# Altium PCB iRat_2.0.PcbDoc
Units mm, origin at the board's own origin, x right, y up, seen from the top; angles counter-clockwise.
Board outline 64 x 62.56 mm, 2 copper layers (Top Layer, Bottom Layer); 82 components, 77 nets, 330 pads, 87 vias.
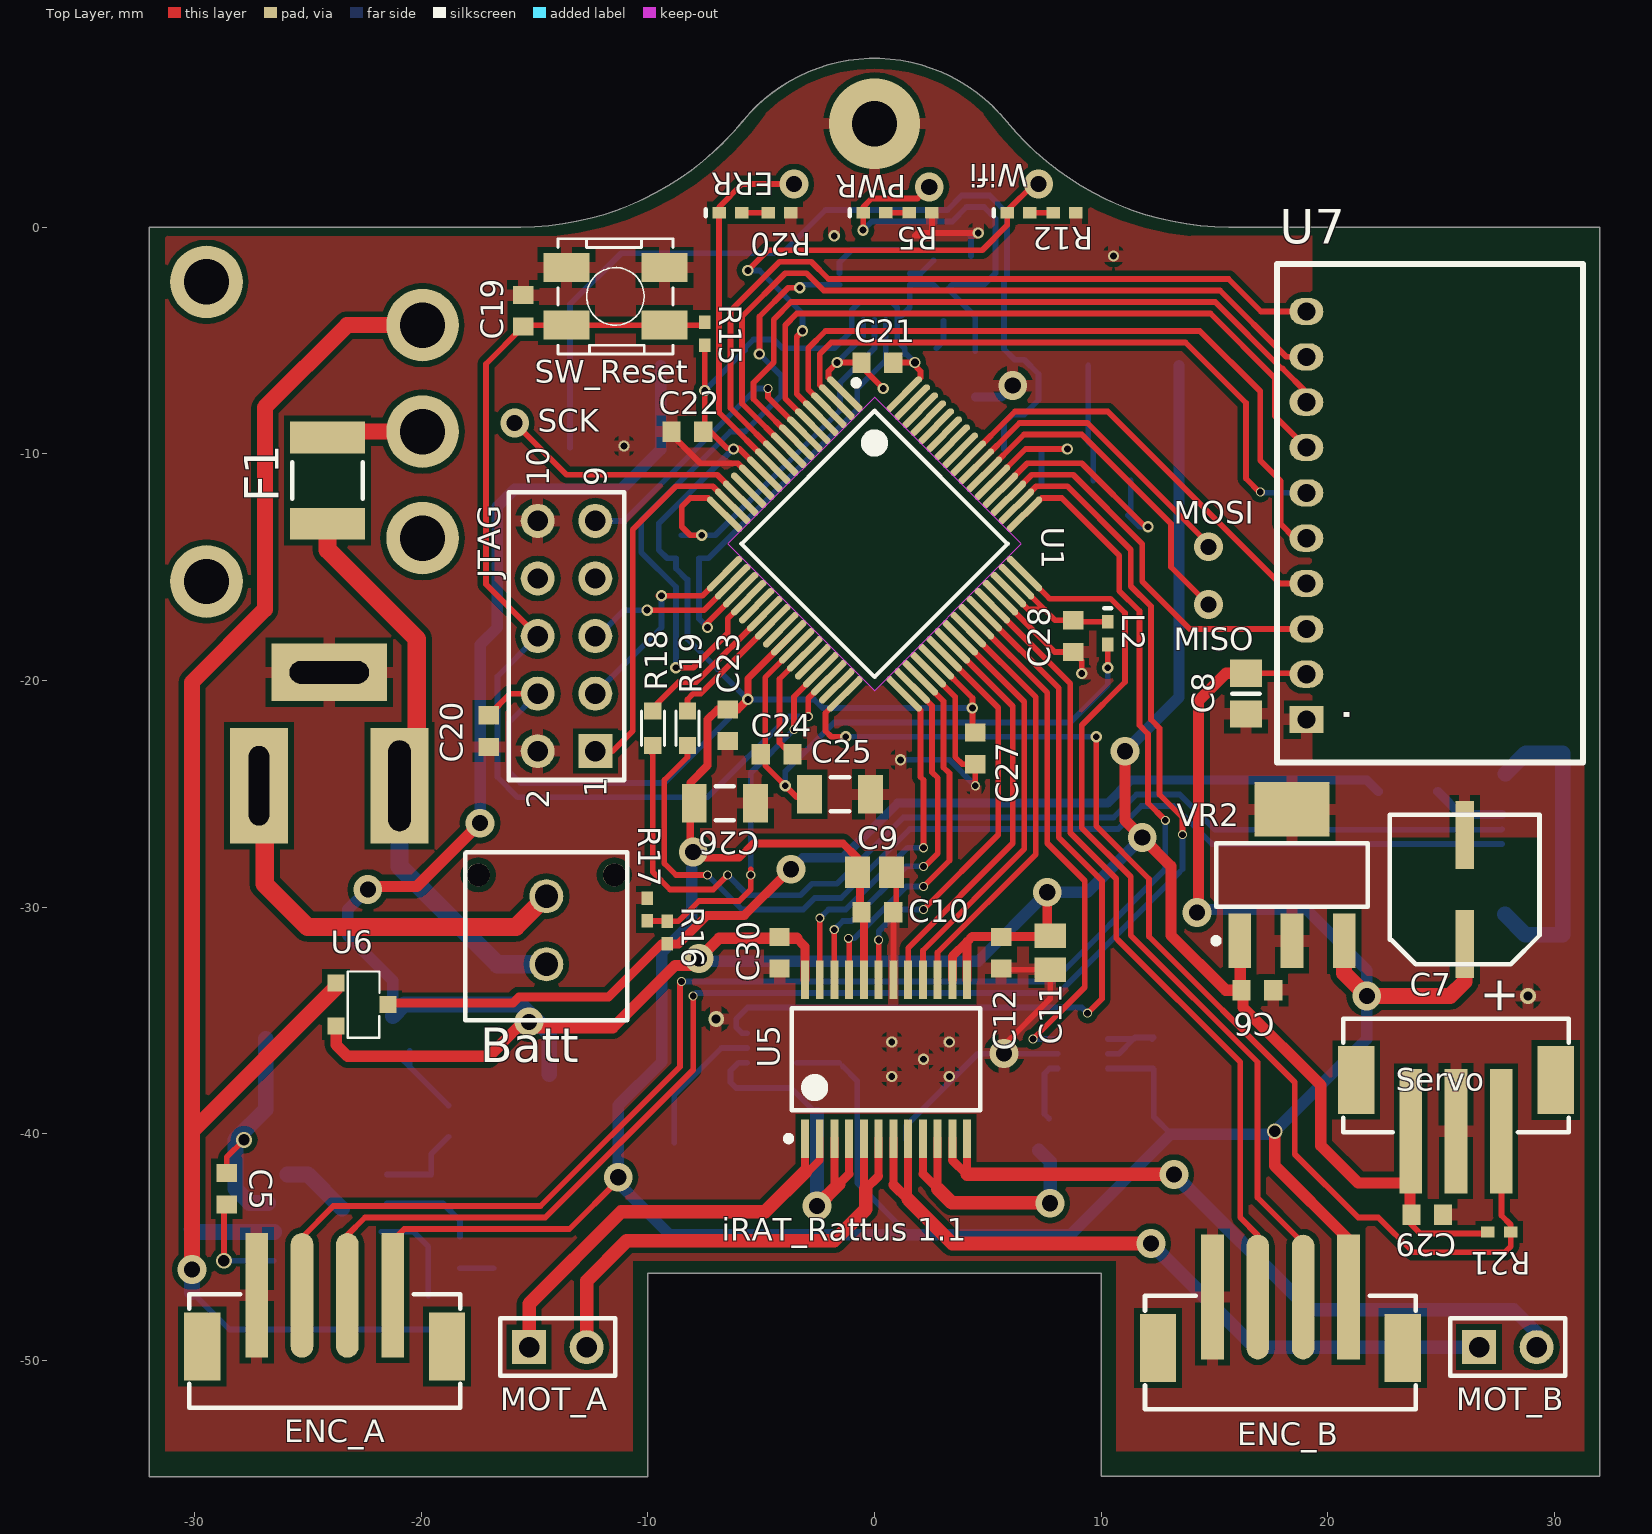
[diagram p0: Top Layer view]
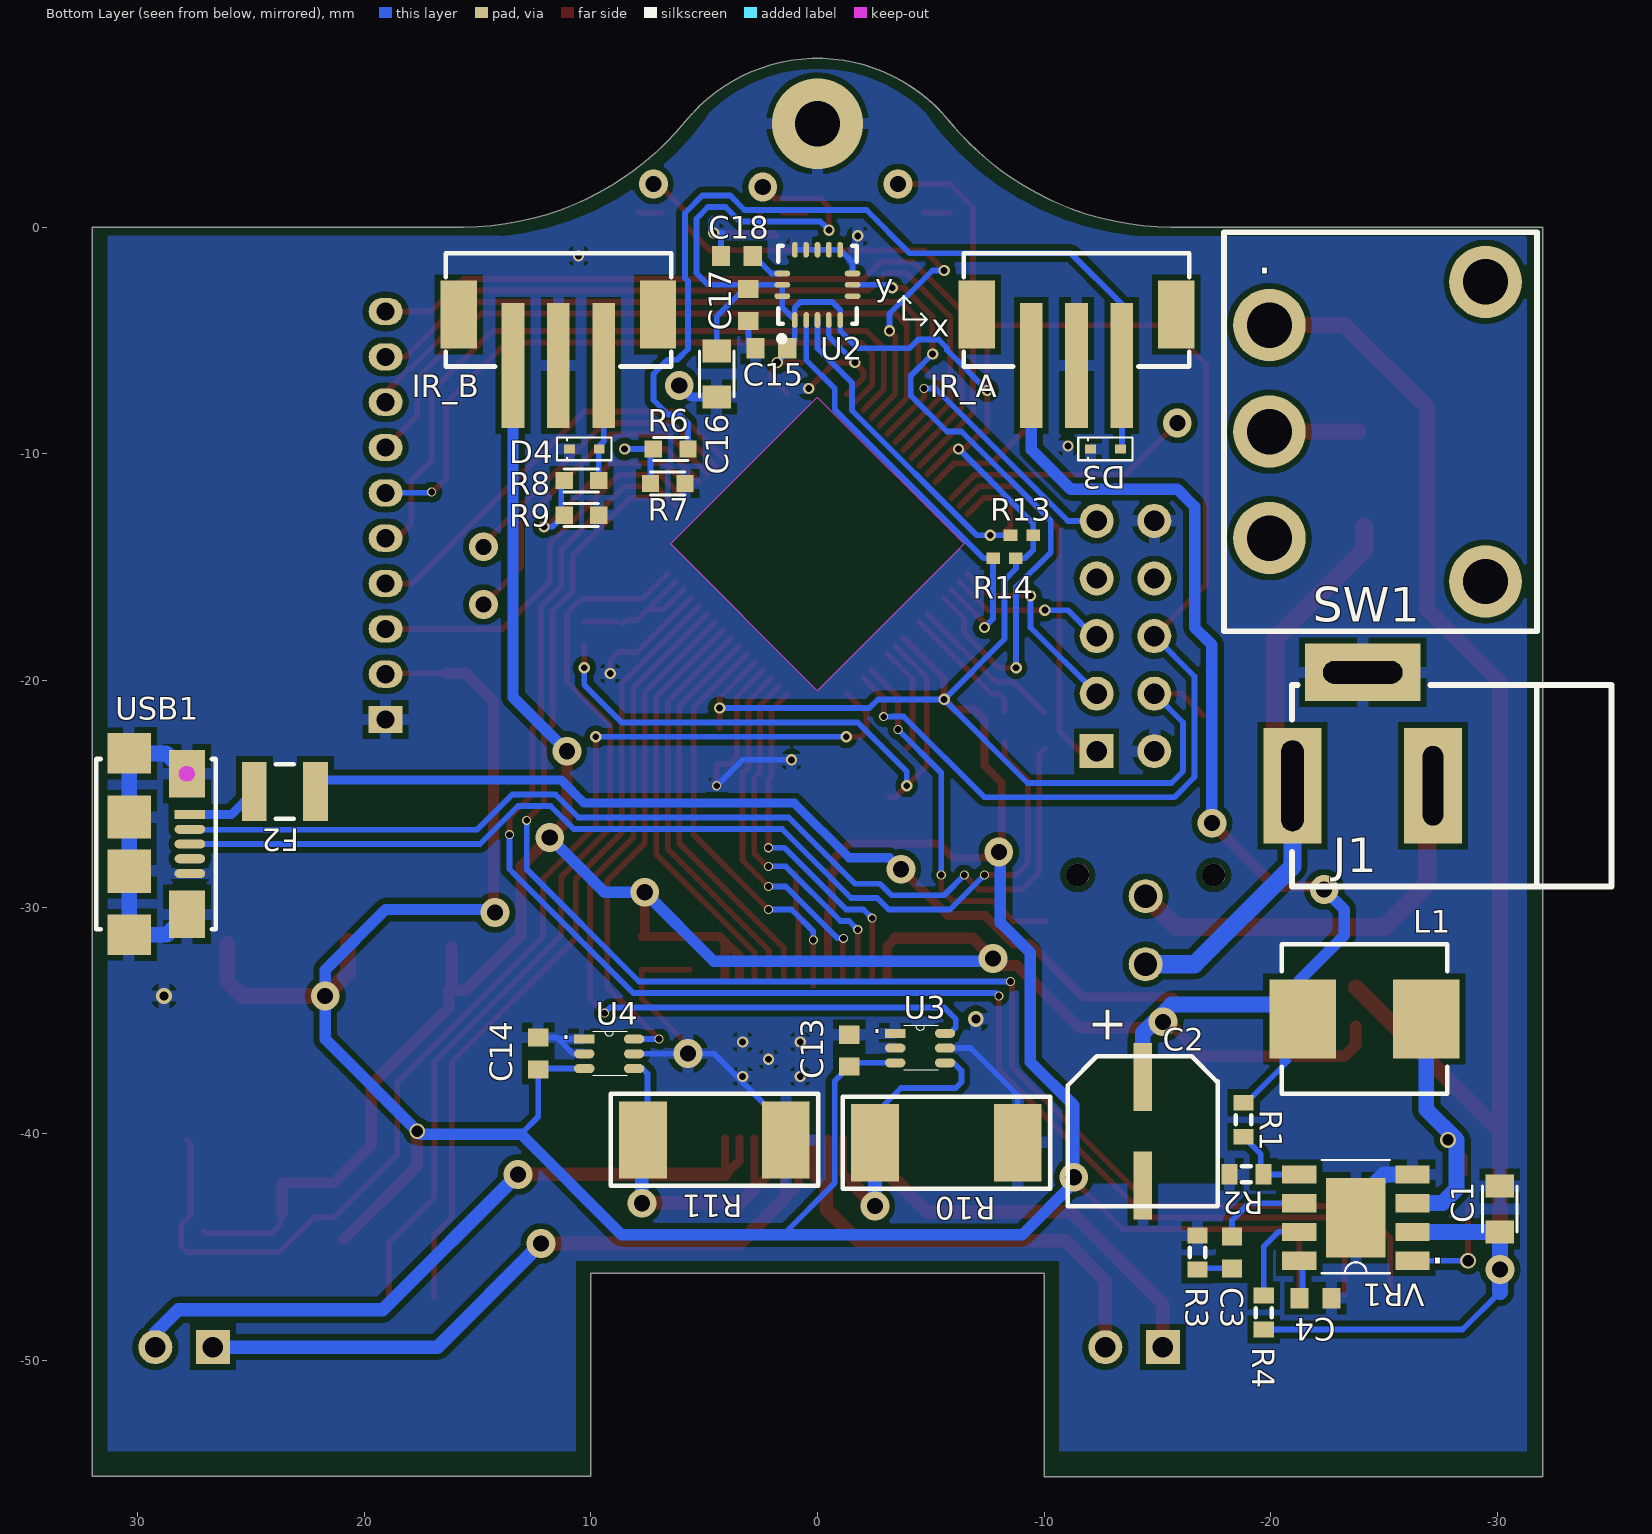
[diagram p1: Bottom Layer view, seen from below]

## Layer stack, top to bottom
Top Solder: solder mask 0.0102, Solder Resist, Dk 3.5
Top Layer: signal copper 0.0356
Dielectric 1: dielectric 0.32, FR-4, Dk 4.8
Bottom Layer: signal copper 0.0356
Bottom Solder: solder mask 0.0102, Solder Resist, Dk 3.5

## Board outline
-32,-55.118 -32,0 -15.616,0 ccw(c-15.684,12.749) -5.836,4.653 cw(c0.002,-0.044) 5.841,4.652 ccw(c15.689,12.749) 15.621,0 32,0 32,-55.108 10,-55.108 10,-46.146 -10,-46.146 -10,-55.118

## Design rules (kind name [scope] priority, off if disabled: settings)
Clearance [All] p1: gap=0.254
HoleSize [All] p1: absolutevalues=TRUE maxlimit=4.064 minlimit=0.762 maxpercent=80.000 minpercent=20.000
HoleToHoleClearance [All] p1: gap=0.152 allowstackedmicrovias=TRUE
MinimumSolderMaskSliver [All] p1: minsoldermaskwidth=0.01
PolygonConnect [All] p1: connectstyle=Relief reliefconductorwidth=0.508 reliefentries=4 polygonreliefangle="90 Angle" airgapwidth=0.254
RoutingVias [All] p1: holewidth=0.762 width=1.27 viastyle="Through Hole" minholewidth=0.762 minwidth=1.27 maxholewidth=1.524 maxwidth=3.048
SilkToSilkClearance [All] p1: silktosilkclearance=0.01
SilkToSolderMaskClearance [IsPad] p1: minsilkscreentomaskgap=0.01 clearancetoexposedcopper=TRUE
SolderMaskExpansion [All] p1: expansion=0.102
Width [All] p1: maxlimit=2.032 minlimit=0.254 preferedwidth=0.508
24 further rules are at their usual default settings.

## Components (designator, comment, footprint, x,y, rotation, side; value= is the part's Value field where it differs from the comment)
Batt "Batt" "Molex 43045-0202" -14.478,-32.512 r0 top
C1 "Cap Semi" 0805E -30.099,-42.291 r270 bottom
C2 "Cap Pol2" Capacitor_SizeD8 -14.351,-39.878 r90 bottom
C3 "Cap Semi" 1608[0603] -18.288,-45.226 r90 bottom
C4 "Cap Semi" 1608[0603] -21.971,-47.244 r0 bottom
C5 "Cap Semi" 1608[0603] -28.575,-42.418 r270 top
C6 "Cap Semi" 1608[0603] 16.891,-33.655 r180 top
C7 "Cap Pol2" Capacitor_SizeD8 26.035,-29.21 r270 top
C8 "Cap Semi" 6-0805_N 16.383,-20.574 r270 top
C9 "Cap Pol3" C0805 0,-28.448 r0 top (schematic designator C10)
C10 "Cap Semi" 1608[0603] 0.127,-30.226 r0 top
C11 "Cap Pol3" C0805 7.747,-32.004 r270 top
C12 "Cap Semi" 1608[0603] 5.588,-32.004 r270 top
C13 "Cap Semi" 1608[0603] -1.397,-36.322 r270 bottom
C14 "Cap Semi" 1608[0603] 12.319,-36.449 r270 bottom
C15 "Cap Semi" 1608[0603] 2.032,-5.334 r180 bottom
C16 "Cap Semi" 0805E 4.445,-7.493 r90 bottom
C17 "Cap Semi" 1608[0603] 3.048,-3.429 r90 bottom
C18 "Req 10nF 10%, 16V Ceramic" 1608[0603] 3.556,-1.27 r180 bottom
C19 "Cap Semi" 1608[0603] -15.494,-3.683 r270 top
C20 "Cap Semi" 1608[0603] -17.018,-22.225 r270 top
C21 "Cap Semi" 1608[0603] 0.127,-5.969 r0 top
C22 "Cap Semi" 1608[0603] -8.255,-9.017 r0 top
C23 "Cap Semi" 1608[0603] -6.477,-21.971 r90 top
C24 "Cap Semi" 1608[0603] -4.318,-23.241 r180 top
C25 "Cap Semi" C1206 -1.524,-25.019 r180 top
C26 "" C1206 -6.604,-25.4 r180 top
C27 "Cap Semi" 1608[0603] 4.445,-22.987 r90 top
C28 "Cap Semi" 1608[0603] 8.763,-18.034 r90 top
C29 "Cap Semi" 1608[0603] 24.384,-43.561 r180 top
C30 "Cap Semi" 1608[0603] -4.191,-32.004 r270 top
D3 "3.3V Zener" MM5Z3V3T1G -12.7,-9.779 r180 bottom
D4 "3.3V Zener" MM5Z3V3T1G 10.287,-9.779 r180 bottom
ENC_A "Header 4" "JST PH 4-Way" -24.257,-47.117 r0 top
ENC_B "Header 4" "JST PH 4-Way" 17.907,-47.193 r0 top
ERR "LNJ347W83RA" 0402-A -6.35,0.635 r0 top
F1 "3A" 1812 -24.13,-11.176 r90 top
F2 "1210L050YR 0.5A" 14-1210 23.495,-24.892 r180 bottom
IR_A "Header 3" "JST PH 3-Way" -11.43,-6.096 r0 bottom
IR_B "Header 3" "JST PH 3-Way" 11.43,-6.096 r0 bottom
J1 "PWR2.1" DCP21 -20.955,-24.638 r270 bottom
JTAG "Header" HDR2X5 -12.319,-23.114 r90 top
L1 "Inductor" SRP7028A-100M -24.13,-34.925 r0 bottom
L2 "Ferrite Bead" 0402-A 10.287,-17.907 r270 top
MOT_A "Header 2" HDR1X2 -15.24,-49.403 r0 top
MOT_B "Header 2" HDR1X2 26.67,-49.403 r0 top
PWR "LNJ347W83RA" 0402-A 0,0.635 r0 top
R1 "Res Semi" J1-0603 -18.796,-39.37 r90 bottom
R2 "Res Semi" J1-0603 -18.923,-41.783 r180 bottom
R3 "Res Semi" J1-0603 -16.764,-45.226 r270 bottom
R4 "Res Semi" J1-0603 -19.685,-47.879 r270 bottom
R5 "Res1" 0402 2.032,0.635 r180 top
R6 "Res1" 0603E 7.239,-9.779 r180 bottom (schematic designator R10)
R7 "Res1" 0603E 5.842,-11.303 r0 bottom (schematic designator R11)
R8 "Res1" 0603E 11.176,-11.176 r180 bottom
R9 "Res1" 0603E 9.652,-12.7 r0 bottom
R10 "Shunt Resistor" ERJM1WS -2.54,-40.386 r180 bottom
R11 "Shunt Resistor" ERJM1WS 1.397,-40.259 r0 bottom
R12 "Res3" 0402 8.382,0.635 r180 top
R13 "Res Semi" 0402 -9.017,-13.589 r180 bottom
R14 "Res Semi" 0402 -8.255,-14.605 r180 bottom
R15 "" 0402 -7.493,-4.699 r90 top
R16 "Res Semi" 0402 -9.144,-31.115 r270 top
R17 "Res Semi" 0402 -10.033,-30.099 r270 top
R18 "Res1" 0603E -9.779,-21.336 r270 top
R19 "Res1" 0603E -8.255,-21.336 r270 top
R20 "Res3" 0402 -4.191,0.635 r180 top
R21 "Res Semi" 0402 27.559,-44.323 r180 top
Servo "Servo1" "JST PH 3-Way" 25.654,-39.878 r180 top
SW1 "SW-SPDT" Slide_Switch -19.939,-9.017 r0 bottom
SW_Reset "RESET" SW16 -9.271,-4.318 r90 top
U1 "ATUC256L3U-AUT" TQFP64_M 0,-13.97 r315 top
U2 "LSM6DS0" LGA16-3X3X1_N 0,-2.54 r90 bottom
U3 "SC70-6" SC70#1 -3.429,-35.56 r180 bottom
U4 "SC70-6" SC70#2 10.287,-35.814 r180 bottom
U5 "TB6612FNG" TSOP65P760X160-24N 0.508,-36.703 r90 top
U6 "FDN306P" FDN306P -21.463,-34.29 r270 top
U7 "USR-WIFI232-T" USR-WIFI232-T 19.05,-21.717 r90 top
USB1 "ZX62-B-5PA(11)" ZX62-B-5PA(11) 27.686,-25.908 r270 bottom
VR1 "AP6503SP-13" SO-8EP -23.749,-43.688 r0 bottom
VR2 "LM3940" SOT223_N 18.415,-28.575 r90 top
Wifi "LNJ347W83RA" 0402-A 6.35,0.635 r0 top

## Footprints (in the part's own frame and the unit in brackets; to place one, negate y for a bottom-side part, rotate by r counter-clockwise, add the part's x,y. Pads: shape width x height; smd on the part's side, far side on the other; paste and mask are expansions set on the pad)
6-0805_N [mm] "Chip Resistor, Body 2.0x1.2mm, IPC Medium Density"
  rect 1.2x1.4 smd: 1(-0.9,0) 2(0.9,0)
  silkscreen extent 0,-0.6 0,0.6, body extent -1.07,-0.7 1.07,0.7, height 0.7
14-1210 [mm] "Chip Resistor, Body 3.2x2.5mm, IPC High Density"
  rect 1.1x2.6 smd: 1(-1.35,0) 2(1.35,0)
  silkscreen extent -0.4,-1.2 0.4,1.2, body extent -1.68,-1.32 1.68,1.32, height 0.9
0402 [mm] "Chip Capacitor, Body 1.0x0.5mm, IPC High Density"
  rect 0.6x0.5 smd: 1(-0.5,0) 2(0.5,0)
  body extent -0.55,-0.3 0.55,0.3, height 1.3
0402-A [mm] "Chip Inductor, Body 1.0x0.5mm, IPC High Density"
  rect 0.6x0.5 smd: 1(-0.5,0) 2(0.5,0)
  silkscreen extent -1.1,-0.15 -1.1,0.15, body extent -0.55,-0.3 0.55,0.3, height 0.55
0603E [mil]
  rect 30x30 smd: 1(0,0) 2(60,0)
  silkscreen extent 0,-20 60,20
0805E [mil]
  rect 40x50 smd: 1(0,0) 2(80,0)
  silkscreen extent 0,-30 80,30
1608[0603] [mm] "Chip Capacitor, Body 1.6x0.8mm, IPC High Density"
  rect 0.8x0.9 smd: 1(-0.7,0) 2(0.7,0)
  body extent -0.87,-0.48 0.87,0.48, height 1.3
1812 [mm] "Chip Capacitor, Body 4.5x3.2mm, IPC High Density"
  rect 1.4x3.3 smd: 1(-1.9,0) 2(1.9,0)
  silkscreen extent -0.8,-1.55 0.8,1.55, body extent -2.4,-1.7 2.4,1.7, height 1.4
C0805 [mm] "Chip Capacitor, Body 2.0x1.3mm, IPC High Density"
  rect 1.1x1.4 smd: 1(-0.75,0) 2(0.75,0)
  body extent -1.1,-0.72 1.1,0.72, height 1.4
C1206 [mm] "Chip Capacitor, Body 3.2x1.6mm, IPC High Density"
  rect 1.1x1.7 smd: 1(-1.35,0) 2(1.35,0)
  silkscreen extent -0.4,-0.75 0.4,0.75, body extent -1.7,-0.9 1.7,0.9, height 1.3
Capacitor_SizeD8 [mm] "100uF EEEFKE101XAP"
  rect 3x0.8 smd: 1(2.4,0) 2(-2.4,0)
  Top Layer pour cut-out: -2.286,-3.3 2.215,-3.3 2.215,-3.246 3.3,-2.161 3.3,2.034 2.034,3.3 -2.286,3.3
  silkscreen extent -3.3,-3.3 3.3,3.3
DCP21 [mm]
  rect 5.08x2.54 hole 1 slot 4 at 0 deg: 1(0,0)
  rect 5.08x2.54 hole 0.9 slot 3.5 at 0 deg: 2(0,6.2)
  rect 2.54x5.08 hole 1 slot 3.5 at 90 deg: 3(-5,3.1)
  silkscreen extent -4.44,-0.02 4.45,14.07
ERJM1WS [mm] "6mOhm Shunt Resistor"
  rect 2.1x3.4 smd: 1(0,0) 2(6.3,0)
  Top Layer pour cut-out: 1.143,2.032 1.143,-2.032 5.207,-2.032 5.207,2.032
  silkscreen extent -1.42,-2.03 7.72,2.03
FDN306P [mm]
  rect 0.76x0.76 smd: D(0,0) G(-0.95,-2.29) S(0.95,-2.29)
  Top Layer pour cut-out: -1.46,-0.378 -1.457,-0.381 1.46,-0.381 1.46,-1.781 1.457,-1.778 -1.46,-1.778
  silkscreen extent -1.46,-1.78 1.46,-0.38
HDR1X2 [mm] "Connector; Header; 2 Position"
  rect 1.5x1.5 hole 0.9: 1(0,0)
  round 1.5 hole 0.9: 2(2.54,0)
  silkscreen extent -1.27,-1.27 3.81,1.27
HDR2X5 [mm] "Connector; Header; 5x2 Position"
  rect 1.5x1.5 hole 0.9: 1(0,0)
  round 1.5 hole 0.9: 2(0,2.54) 3(2.54,0) 4(2.54,2.54) 5(5.08,0) 6(5.08,2.54) 7(7.62,0) 8(7.62,2.54) 9(10.16,0) 10(10.16,2.54)
  silkscreen extent -1.27,-1.27 11.43,3.81
J1-0603 [mm] "Chip Resistor, Body 1.6x0.8mm, IPC High Density"
  rect 0.7x0.9 smd: 1(-0.75,0) 2(0.75,0)
  silkscreen extent -0.2,-0.35 0.2,0.35, body extent -0.85,-0.48 0.85,0.48, height 0.9
"JST PH 3-Way" [mm] "SMT Vertical"
  rect 1x5.5 smd: 1(-2,0) 2(0,0) 3(2,0)
  rect 1.6x3 smd: ""(-4.4,-2.25) ""(4.4,-2.25)
  silkscreen extent -4.97,-4.95 4.97,0.05
"JST PH 4-Way" [mm] "SMT Vertical"
  rect 1x5.5 smd: 1(-3,0) 4(3,0)
  oval 1x5.5 smd: 2(-1,0) 3(1,0)
  rect 1.6x3 smd: ""(-5.4,-2.25) ""(5.4,-2.25)
  silkscreen extent -5.97,-4.95 5.97,0.05
LGA16-3X3X1_N [mm] "PQFN, 16-Leads, Body 3x3mm, Pitch 0.5mm, IPC Medium Density"
  oval 0.7x0.25 smd: 1(-1.55,1) 2(-1.55,0.5) 3(-1.55,0) 4(-1.55,-0.5) 5(-1.55,-1) 9(1.55,-1) 10(1.55,-0.5) 11(1.55,0) 12(1.55,0.5) 13(1.55,1)
  oval 0.25x0.7 smd: 6(-0.5,-1.55) 7(0,-1.55) 8(0.5,-1.55) 14(0.5,1.55) 15(0,1.55) 16(-0.5,1.55)
  silkscreen extent -2.5,-1.73 1.73,1.73, body extent -1.58,-1.58 1.58,1.58, height 1
MM5Z3V3T1G [mm]
  rect 0.48x0.4 smd: 1(-0.66,0) 2(0.66,0)
  silkscreen extent -1.2,-0.5 1.2,0.5
"Molex 43045-0202" [mm] "Battery Connector"
  round 1.5 hole 1.02: 1(0,0) 2(0,3)
  round 1.02 hole 1.02 unplated: ""(-3,3.94) ""(3,3.94)
  silkscreen extent -3.57,-2.47 3.57,4.93
SC70#1 [mm] "Current Sense Comparator"
  rect 0.9x0.4 smd: 1(0,0)
  oval 0.9x0.4 smd: 2(0,-0.65) 3(0,-1.3) 4(2.2,-1.3) 5(2.2,-0.65) 6(2.2,0)
  Top Layer pour cut-out: 0.381,0.325 0.381,-1.625 1.905,-1.625 1.905,0.325
  silkscreen extent 0.38,-1.63 1.91,0.33
SC70#2 [mm]
  rect 0.9x0.4 smd: 1(0,0)
  oval 0.9x0.4 smd: 2(0,-0.65) 3(0,-1.3) 4(2.2,-1.3) 5(2.2,-0.65) 6(2.2,0)
  silkscreen extent 0.38,-1.63 1.91,0.33
Slide_Switch [mm]
  round 3.2 hole 2: 1(0,-4.7) 2(0,0) 3(0,4.7) 4(-9.53,-6.61) 4(-9.53,6.61)
  silkscreen extent -11.8,-8.8 2,8.8
SO-8EP [mm]
  rect 1.505x0.802 smd: 1(-2.497,1.905) 2(-2.497,0.635) 3(-2.497,-0.635) 4(-2.497,-1.905) 5(2.498,-1.905) 6(2.498,-0.635) 7(2.498,0.635) 8(2.498,1.905)
  rect 2.613x3.502 smd: ""(0,0)
  silkscreen extent -1.5,-2.54 1.5,2.45
SOT223_N [mm] "SOT223, 4-Leads, Body 6.5x3.5mm, Pitch 2.3mm, Lead Span 7mm, IPC Medium Density"
  rect 2.4x1 smd: 1(-2.9,2.3) 2(-2.9,0) 3(-2.9,-2.3)
  rect 2.4x3.3 smd: 4(2.9,0)
  silkscreen extent -3.02,-3.35 1.4,3.47, body extent -1.85,-3.35 1.85,3.35, height 1.7
SRP7028A-100M [mm] "10uH Inductor"
  rect 2.95x3.5 smd: 1(-2.725,0) 2(2.725,0)
  Top Layer pour cut-out: -3.65,3.3 3.65,3.3 3.65,-3.3 -3.65,-3.3
  silkscreen extent -3.65,-3.3 3.65,3.3
SW16 [mil]
  rect 50x80 smd: 1(0,170) 1(0,0) 2(100,170) 2(100,0)
  silkscreen extent -50,-15 150,185
TQFP64_M [mm] "Thin QFP, 64-Leads, Body 10x10mm, Pitch 0.5mm, IPC Low Density"
  oval 2.1x0.3 smd: 1(-5.6,3.75) 2(-5.6,3.25) 3(-5.6,2.75) 4(-5.6,2.25) 5(-5.6,1.75) 6(-5.6,1.25) 7(-5.6,0.75) 8(-5.6,0.25) 9(-5.6,-0.25) 10(-5.6,-0.75) 11(-5.6,-1.25) 12(-5.6,-1.75) 13(-5.6,-2.25) 14(-5.6,-2.75) 15(-5.6,-3.25) 16(-5.6,-3.75) 33(5.6,-3.75) 34(5.6,-3.25) 35(5.6,-2.75) 36(5.6,-2.25) 37(5.6,-1.75) 38(5.6,-1.25) 39(5.6,-0.75) 40(5.6,-0.25) 41(5.6,0.25) 42(5.6,0.75) 43(5.6,1.25) 44(5.6,1.75) 45(5.6,2.25) 46(5.6,2.75) 47(5.6,3.25) 48(5.6,3.75)
  oval 0.3x2.1 smd: 17(-3.75,-5.6) 18(-3.25,-5.6) 19(-2.75,-5.6) 20(-2.25,-5.6) 21(-1.75,-5.6) 22(-1.25,-5.6) 23(-0.75,-5.6) 24(-0.25,-5.6) 25(0.25,-5.6) 26(0.75,-5.6) 27(1.25,-5.6) 28(1.75,-5.6) 29(2.25,-5.6) 30(2.75,-5.6) 31(3.25,-5.6) 32(3.75,-5.6) 49(3.75,5.6) 50(3.25,5.6) 51(2.75,5.6) 52(2.25,5.6) 53(1.75,5.6) 54(1.25,5.6) 55(0.75,5.6) 56(0.25,5.6) 57(-0.25,5.6) 58(-0.75,5.6) 59(-1.25,5.6) 60(-1.75,5.6) 61(-2.25,5.6) 62(-2.75,5.6) 63(-3.25,5.6) 64(-3.75,5.6)
  silkscreen extent -5.72,-4.15 4.15,4.57, body extent -5,-5 5,5, height 1.2
TSOP65P760X160-24N [mm] "TSOP, 24-Leads, Body 7.95x5.60mm, Pitch 0.65mm, IPC Medium Density"
  rect 1.7x0.35 smd: 1(-3.5,3.575) 2(-3.5,2.925) 3(-3.5,2.275) 4(-3.5,1.625) 5(-3.5,0.975) 6(-3.5,0.325) 7(-3.5,-0.325) 8(-3.5,-0.975) 9(-3.5,-1.625) 10(-3.5,-2.275) 11(-3.5,-2.925) 12(-3.5,-3.575) 13(3.5,-3.575) 14(3.5,-2.925) 15(3.5,-2.275) 16(3.5,-1.625) 17(3.5,-0.975) 18(3.5,-0.325) 19(3.5,0.325) 20(3.5,0.975) 21(3.5,1.625) 22(3.5,2.275) 23(3.5,2.925) 24(3.5,3.575)
  silkscreen extent -3.62,-4.15 2.25,4.42, body extent -2.9,-4.15 2.9,4.15, height 1.6
USR-WIFI232-T [mm] "Wifi Module"
  rect 1.2x1.5 hole 0.8: 1(0,0)
  oval 1.2x1.5 hole 0.8: 2(2,0) 3(4,0) 4(6,0) 5(8,0) 6(10,0) 7(12,0) 8(14,0) 9(16,0) 10(18,0)
  Top Layer pour cut-out: -1.9,-0.254 20.1,-0.254 20.1,-12.2 -1.9,-12.2
  silkscreen extent -1.9,-12.2 20.1,1.3
ZX62-B-5PA(11) [mm] "Micro"
  rect 0.4x1.35 smd: 1(0,0)
  oval 0.4x1.35 smd: 2(0.65,0) 3(1.3,0) 4(1.95,0) 5(2.6,0)
  rect 2.1x1.6 smd: SH1(-1.8,-0.125) SH2(4.4,-0.125)
  rect 1.8x1.9 smd: SH3(-2.7,-2.675) SH6(5.3,-2.675)
  rect 1.9x1.9 smd: SH4(0.1,-2.675) SH5(2.5,-2.675)
  silkscreen extent -2.45,-4.13 5.05,1.14

## Part data
Batt: library part "Header 2", "Header, 2-Pin"
C1 C3 C4 C5 C6 C8 C10 C12 C13 C14 C15 C16 C17 C19 C20 C21 C22 C23 C24 C25 C27 C28 C29 C30: "Capacitor (Semiconductor SIM Model)"
C2 C7: "Polarized Capacitor (Radial)"
C9 C11: "Polarized Capacitor (Surface Mount)"
C18 C26: library part "Cap Semi", "Capacitor (Semiconductor SIM Model)"
D3 D4: library part "D Zener", "Zener Diode"
ENC_A ENC_B: "Header, 4-Pin"
ERR Wifi: library part LED2, "GREEN Wifi LED"
F1 F2: library part "Fuse 2", "Fuse"
IR_A IR_B: "Header, 3-Pin"
J1: library part PWR2.5, "Low Voltage Power Supply Connector"
JTAG: library part "Header 5X2", "Header, 5-Pin, Dual row"
L2: library part Inductor, "MLS0805-4S7-301"
MOT_A MOT_B: "Header, 2-Pin"
PWR: library part LED2, "GREEN Power LED"
R1 R2 R3 R4 R13 R14 R16 R17 R21: "Semiconductor Resistor"
R5 R6 R7 R8 R9 R12 R18 R19 R20: "Resistor"
R10 R11: library part Res1, "Current Sense Resistor"
R15: library part "Res Semi", "Semiconductor Resistor"
Servo: library part "Header 3", "Header, 3-Pin"
SW1: "SPDT Subminiature Toggle Switch, Right Angle Mounting, Vertical Actuation"
SW_Reset: library part "SW DIP-2", "DIP Switch, 2 Position, SPST"
U1: "Atmel 32-bit AVR UC3 Microcontroller"
U2: "gyroscope and accelerometer"
U5: library part "TB6612FNG IC", "Motor Driver IC"
USB1: "Micro-B USB Receptacle"
VR1: "Adjustable Switching Regulator"
VR2: library part "Volt Reg", "Voltage Regulator"

## Via types
v1: diameter 0.5, hole 0.3, Top Layer to Bottom Layer, 33 vias
v2: diameter 1.27, hole 0.711, Top Layer to Bottom Layer, 25 vias
v3: diameter 0.4, hole 0.3, Top Layer to Bottom Layer, 22 vias
v4: diameter 0.7, hole 0.5, Top Layer to Bottom Layer, 3 vias
v5: diameter 0.7, hole 0.4, Top Layer to Bottom Layer, 2 vias
v6: diameter 0.5, hole 0.35, Top Layer to Bottom Layer, 1 vias
v7: diameter 4, hole 2, Top Layer to Bottom Layer, 1 vias

## Nets (pads, with @x,y where several pads share a name; then routed paths per layer and width w, separated by ;. In a path a pad name is that pad's centre, name@x,y a point inside that pad or via, vN(x,y) a via of type N, cw(c..) or ccw(c..) an arc to the next point about the centre after c; other vN are vias at no path point)
+3.3V: C7.1 C8.1 C9.1 C10.1 C13.2 C14.2 C15.2 C16.2 C17.2 C20.1 C21.2 C22.2 C23.2 C26.2 C27.2 ENC_A.4 ENC_B.4 JTAG.4 PWR.1 R13.2 R14.2 R15.1 U1.11 U1.25 U1.37 U1.64 U2.1 U2.5 U2.15 U2.16 U3.3 U4.3 U5.20 U7.2 VR2.3 | length 240.4
  Top Layer w0.254: ENC_A.4 ENC_A.4@-21.257,-44.498 ; ENC_A.4@-21.257,-44.704 -20.749,-44.196 -13.462,-44.196 v2@-11.303,-42.037 ; C20.1 -16.067,-20.574 JTAG.4 ; R15.1@-7.493,-5.388 -7.493,-9.017 -7.239,-9.017 -6.505,-9.751 -5.987,-9.751 U1.11 ; C10.1@-0.635,-30.079 C10.1@-0.467,-30.247 ; C9.1@-0.635,-28.587 C9.1@-0.446,-28.398 ; v1@-0.5,0.119 -0.5,0.897 -0.131,1.266 1.901,1.266 v2(2.413,1.778) ; C21.2@0.7,-5.969 1.651,-5.969 2.032,-6.35 2.032,-6.635 U1.64 ; U1.37 4.318,-20.763 C27.2@4.318,-22.098 ; C8.1 U7.2@18.966,-19.674
  Top Layer w0.3: v1(-5.588,-20.828) -5.588,-19.912 U1.25
  Top Layer w0.35: v1(-5.588,-20.828) -6.031,-21.271 -6.92,-21.271 -7.366,-21.717 -7.366,-23.749 -8.128,-24.511 -8.128,-27.178 -7.493,-27.813 -5.969,-27.813 -5.334,-27.178 -1.397,-27.178 -0.75,-27.825 C9.1 ; C10.1@-0.635,-30.079 C9.1@-0.635,-28.587 ; U5.20 C10.1@-0.467,-30.247
  Top Layer w0.5: v2(14.224,-30.226) 14.293,-30.157 14.293,-20.886 15.505,-19.674 C8.1 ; v4(17.653,-39.878) 17.653,-41.402 ENC_B.4@20.907,-44.656
  Top Layer w0.7: VR2.3 20.715,-32.907 v2(21.717,-33.909) 25.4,-33.909 26.035,-33.274 C7.1
  Bottom Layer w0.254: JTAG.4 -16.129,-21.844 -16.129,-24.003 -15.621,-24.511 -9.271,-24.511 v1(-5.588,-20.828) ; -8.29,-15.529 -8.759,-15.059 -8.755,-14.694 R14.2 -9.144,-14.605 -9.517,-14.232 R13.2 -9.517,-13.063 v1@-6.228,-9.774 ; -8.255,-15.529 -8.255,-18.161 v1(-5.588,-20.828) ; v1(-7.493,-7.202) -5.711,-5.42 -5.711,-5.327 -5.341,-4.957 -4.441,-4.957 -4.064,-5.334 -1.778,-5.334 -1,-4.556 U2.5 ; U3.3 C13.2@-1.559,-36.86 ; C13.2 -0.762,-37.657 -0.762,-42.164 1.524,-44.45 ; U2.5@-1.006,-4.09 -1.006,-3.655 -0.653,-3.302 0.762,-3.302 1,-3.54 U2.1 ; v1(-0.508,-0.127) -0.127,0.254 3.426,0.254 4.061,0.889 4.826,0.889 5.341,0.374 5.341,-2.025 4.826,-2.54 3.426,-2.54 3.237,-2.729 4.445,-3.937 C16.2 ; C15.2@1.332,-5.588 C15.2 1,-5.002 U2.1 ; C15.2@1.332,-5.523 v6(1.778,-5.969) ; C17.2@2.794,-2.729 2.605,-2.54 U2.15 U2.16 1.55,-3.54 U2.1 ; v1(4.318,-21.209) -2.286,-21.209 -2.667,-20.828 v1(-5.588,-20.828) ; U4.3 C14.2@12.284,-37.114 ; C14.2 12.319,-39.243 13.081,-40.005
  Bottom Layer w0.5: -8.07,-28.283 -8.07,-30.676 -9.39,-31.996 -9.39,-36.822 -11.303,-38.735 -11.303,-42.164 -9.017,-44.45 8.636,-44.45 13.081,-40.005 17.526,-40.005 v4(17.653,-39.878) 21.717,-35.814 v2(21.717,-33.909) 21.717,-32.766 19.05,-30.099 v2@14.605,-30.099
  other v1: -6.223,-9.779
  other v2: -11.303,-41.91 -8.001,-27.559
+5V: C2.1 C6.2 C11.1 C12.1 C29.2 C30.1 IR_A.3 IR_B.3 L1.2 R1.2 R21.2 Servo.3 U5.13 U5.14 U5.24 U6.S VR2.1 | length 160.5
  Top Layer w0.254: C29.2 23.684,-44.004 24.072,-44.392 26.99,-44.392 R21.2
  Top Layer w0.4: -3.429,-31.369 -3.067,-31.731 U5.24 ; U5.14 3.433,-32.165 4.083,-31.515 ; U5.13 4.083,-31.515 ; C11.1@7.62,-31.179 v2(7.62,-29.337) ; C11.1@7.721,-31.28 4.318,-31.28 4.083,-31.515
  Top Layer w0.5: U6.S -23.753,-36.064 -23.241,-36.576 -17.018,-36.576 -15.811,-35.369 ; v2@-22.352,-29.083 -20.193,-29.083 v2(-17.399,-26.289) ; v2(-15.24,-35.052) -15.494,-35.052 -15.748,-35.306 -11.537,-35.306 -8.801,-32.57 -8.059,-32.57 -6.858,-31.369 -3.429,-31.369 ; v2(11.049,-23.114) 11.049,-26.162 v2(11.811,-26.924) 13.081,-28.194 13.081,-31.242 15.494,-33.655 C6.2@16.002,-33.655 ; C6.2@16.129,-33.528 VR2.1@16.129,-31.729 ; C6.2@16.256,-33.655 16.256,-34.417 19.685,-37.846 19.685,-40.513 21.336,-42.164 23.622,-42.164 C29.2@23.622,-43.561
  Bottom Layer w0.254: -20.759,-36.784 R1.2@-18.796,-38.747 ; -20.503,-37.054 L1.2@-20.503,-36.324
  Bottom Layer w0.5: v2(-22.352,-29.21) -23.241,-30.099 -23.241,-31.242 -21.253,-33.23 L1.2@-21.253,-34.798 ; v2(-17.399,-26.289) -17.399,-18.415 -16.637,-17.653 -16.637,-12.319 -15.875,-11.557 -11.176,-11.557 -9.43,-9.811 IR_A.3 ; v2@-8.128,-32.385 4.572,-32.385 v2(7.62,-29.337) 9.398,-29.337 v2(11.811,-26.924) ; v2(11.049,-23.114) 13.43,-20.733 IR_B.3
  Bottom Layer w0.7: L1.2@-21.253,-34.798 -20.745,-34.29 -15.621,-34.29 -14.351,-35.56 C2.1@-14.351,-37.351
  other v2: -7.747,-32.258
ABDACB-CLK: U1.57
ABDACB-DAC0: U1.58
ABDACB-DAC1: U1.59
ABDACB-DACN0: U1.60
AIN1: U1.35 U5.21 | length 16.3
  Top Layer w0.254: U5.21 v3@-1.117,-31.369 ; U1.35 3.048,-20.907 3.048,-23.836 3.302,-24.09 3.302,-27.94 v3(2.159,-29.083)
  Bottom Layer w0.254: v3(-1.143,-31.369) -0.889,-31.369 1.397,-29.083 v3(2.159,-29.083)
AIN2: U1.34 U5.22 | length 16
  Top Layer w0.254: v3(-1.778,-30.988) -1.778,-33.192 U5.22 ; U1.34 2.54,-21.106 2.54,-24.047 2.794,-24.301 2.794,-27.619 2.219,-28.194 v3(2.159,-28.194)
  Bottom Layer w0.254: v3(-1.778,-30.988) -1.397,-30.607 -1.016,-30.607 1.397,-28.194 v3(2.159,-28.194)
BGND: Batt.2 J1.2 | length 18.1
  Top Layer w0.8: J1.2@-26.901,-25.931 -26.901,-28.979 -25.019,-30.861 -15.827,-30.861 Batt.2
  Bottom Layer w0.5: J1.2@-27.536,-25.931 J1.2@-27.536,-24.638
BIN1: U1.39 U5.17 | length 17.7
  Top Layer w0.254: U5.17 1.483,-31.791 6.096,-27.178 6.096,-21.209 ; U1.39 6.096,-21.127
BIN2: U1.40 U5.16 | length 18.1
  Top Layer w0.254: U5.16 2.133,-31.903 6.604,-27.432 6.604,-20.928 U1.40
ENCA1: ENC_A.3 U1.50 | length 69.5
  Top Layer w0.254: ENC_A.3 -23.257,-44.466 -22.479,-43.688 -14.522,-43.688 -8.001,-37.167 v3(-8.001,-33.909) ; U1.50 7.136,-11.43 8.509,-11.43 11.307,-14.228 11.307,-15.835 12.192,-16.72 12.192,-21.717 12.573,-22.098 12.573,-25.019 13.589,-26.035 v3(13.589,-26.797)
  Bottom Layer w0.254: v3(-8.001,-33.909) -7.874,-33.782 8.128,-33.782 13.462,-28.448 ; 13.589,-28.321 v3(13.589,-26.797)
ENCA2: ENC_A.2 U1.49 | length 69.7
  Top Layer w0.254: ENC_A.2 -25.257,-44.561 -23.876,-43.18 -14.732,-43.18 -8.582,-37.03 -8.582,-33.347 v3(-8.509,-33.274) ; U1.49@6.633,-12.684 7.379,-11.938 8.255,-11.938 10.799,-14.482 10.799,-16.046 11.684,-16.931 11.684,-21.971 12.065,-22.352 12.065,-25.4 v3(12.827,-26.162)
  Bottom Layer w0.254: v3(-8.509,-33.274) 7.874,-33.274 12.827,-28.321 v3(12.827,-26.162)
ENCB1: ENC_B.3 U1.48 | length 40.2
  Top Layer w0.254: U1.48 7.716,-16.383 10.414,-16.383 11.049,-17.018 11.049,-20.066 9.144,-21.971 9.144,-26.499 11.299,-28.654 11.299,-31.238 16.891,-36.83 16.891,-42.799 18.907,-44.815 ENC_B.3
ENCB2: ENC_B.2 U1.44 | length 35.3
  Top Layer w0.254: U1.44 8.636,-20.131 8.636,-26.71 10.668,-28.742 10.668,-31.369 ; 10.731,-31.432 16.129,-36.83 16.129,-43.688 16.907,-44.466 ENC_B.2
ERROR_LED: ERR.1 U1.10 | length 16.1
  Top Layer w0.254: ERR.1@-6.858,0.635 -6.858,-8.173 U1.10 ; ERR.1 -6.85,0.897 -5.842,1.905 v2(-3.556,1.905)
GND: C1.1 C2.2 C4.1 C6.1 C7.2 C8.2 C9.2 C10.2 C11.2 C12.2 C13.1 C14.1 C15.1 C16.1 C17.1 C18.1 C19.1 C20.2 C21.1 C22.1 C23.1 C24.1 C25.1 C26.1 C27.1 C28.1 C29.1 C30.2 D3.1 D4.1 ENC_A.1 ENC_B.1 IR_A.2 IR_B.2 J1.3 JTAG.2 JTAG.10 R2.1 R3.1 R5.1 R7.1 R9.1 R10.2 R11.1 R12.1 R17.1 R20.1 Servo.2 SW_Reset.2 U1.1 U1.12 U1.27 U1.36 U1.45 U2.4 U2.8 U2.9 U2.10 U2.11 U2.12 U2.13 U3.1 U3.2 U3.5 U4.1 U4.2 U4.5 U5.18 U7.1 USB1.5 USB1.SH1 USB1.SH2 USB1.SH3 USB1.SH4 USB1.SH5 USB1.SH6 VR1. VR1.4 VR2.2 VR2.4 | length 90.9
  Top Layer w0.254: C22.1@-9.082,-9.017 -7.685,-10.414 -6.031,-10.414 U1.12 ; C24.1@-3.937,-22.987 -4.191,-22.733 -4.191,-19.929 U1.27 ; U1.1 -2.032,-6.635 -2.032,-6.35 v1(-1.651,-5.969) C21.1 -0.573,-6.158 v1(0.381,-7.112) ; U5.18 0.833,-30.347 0.954,-30.226 C9.2@0.954,-28.498 ; U1.36 3.556,-20.708 3.556,-23.368 3.875,-23.687 C27.1 v3(4.445,-24.638) ; R5.1 2.532,-0.373 1.786,-0.373 1.905,-0.254 v1(4.572,-0.254) ; U1.45 7.946,-18.734 C28.1 9.144,-19.115 v1(9.144,-19.685) ; C12.2@5.638,-32.754 C11.2 7.747,-34.036 5.715,-36.068 v2(5.715,-36.449)
  Bottom Layer w0.254: R10.2 -8.84,-38.304 -6.746,-36.21 U3.5 ; v1(-1.651,-5.969) -0.5,-4.818 U2.4 ; U2.8@-1.55,-2.034 -1.55,-1.54 U2.9 U2.10 U2.11 U2.12 U2.13 ; v1(1.143,-23.495) 3.302,-23.495 v3(4.445,-24.638) ; R11.1 1.397,-39.624 4.557,-36.464 U4.5 ; C15.1 3.048,-5.018 C17.1 ; C18.1 4.256,-0.389 4.191,-0.324 4.191,-0.254 v1(4.572,-0.254) ; U4.2 10.78,-36.464 11.43,-35.814 ; U4.1 11.43,-35.814 ; C14.1@12.254,-35.814 C14.1 11.495,-35.749 11.43,-35.814
  Bottom Layer w0.4: C16.1 5.588,-7.493 v2(6.096,-6.985)
  Bottom Layer w0.7: VR1.4@-25.908,-41.783 -25.005,-41.783 VR1.@-23.493,-43.294 ; USB1.SH2 28.711,-31.208 USB1.SH6 USB1.SH5 USB1.SH4 USB1.SH3 28.735,-23.208 USB1.SH1@27.835,-24.108
  other v1: 0.762,-37.465 3.302,-37.465 2.159,-36.703 0.762,-35.941 3.302,-35.941 -11.049,-9.652 10.541,-1.27 -1.778,-0.381
  other v5: -6.985,-34.925 28.829,-33.909
  other v7: 0,4.572
GYRO_INT: U1.20 U2.7 | length 28.4
  Top Layer w0.254: v1(-8.763,-19.431) -8.001,-19.431 -6.477,-17.907 -6.477,-17.265 U1.20 ; v1(-5.08,-5.588) -5.08,-3.937 -3.81,-2.667 v1(-3.302,-2.667)
  Bottom Layer w0.254: v1@-8.636,-19.431 v1(-8.763,-19.431) -8.763,-15.875 -10.287,-14.351 -10.287,-12.94 -6.357,-9.011 -5.709,-9.011 -4.118,-7.42 -4.118,-6.55 v1@-4.983,-5.685 ; v1@-3.302,-2.54 U2.7
I2C_SCL: R14.1 U1.19 U2.2 | length 19.6
  Top Layer w0.254: v1@-7.469,-17.55 U1.19
  Bottom Layer w0.254: v1(-7.366,-17.653) -7.747,-17.272 -7.747,-14.605 -7.326,-14.605 -0.762,-8.041 -0.762,-7.112 0.5,-5.85 U2.2
I2C_SDA: R13.1 U1.16 U2.3 | length 18.2
  Top Layer w0.254: v1(-7.62,-13.589) -8.128,-13.589 -8.509,-13.208 -8.509,-12.319 -8.128,-11.938 -7.335,-11.938 U1.16
  Bottom Layer w0.254: R13.1 -7.029,-13.589 -1.524,-8.084 -1.524,-6.858 0,-5.334 U2.3
IR_A_ADC: R6.1 R7.2 U1.53 | length 6.6
  Top Layer w0.254: U1.53 6.666,-9.779 v1(8.509,-9.779)
  Bottom Layer w0.254: R6.1 v1(8.509,-9.779) ; R7.2 R6.1@7.366,-9.906
IR_B_ADC: R8.1 R9.2 U1.52 | length 10.9
  Top Layer w0.254: U1.52 6.738,-10.414 9.144,-10.414 v1@12.002,-13.271
  Bottom Layer w0.254: R9.2@11.303,-12.573 R8.1@11.303,-11.176 ; R9.2@11.43,-12.7 R9.2 11.684,-13.208 v1(12.065,-13.208)
MISO: U1.54 | length 14.8
  Top Layer w0.254: U1.54 6.594,-9.144 9.144,-9.144 13.081,-13.081 13.081,-14.986 v2(14.732,-16.637)
MOSI: U1.55 | length 13.3
  Top Layer w0.254: U1.55 6.395,-8.636 9.398,-8.636 v2@14.795,-14.034
  other v2: 14.732,-14.097
NetC3_1: C3.1 R3.2 | length 1.5
  Bottom Layer w0.254: C3.1 R3.2@-16.814,-45.926
NetC3_2: C3.2 VR1.6 | length 4.2
  Bottom Layer w0.254: VR1.6@-21.504,-43.055 -19.048,-43.055 -18.288,-43.815 C3.2
NetC4_2: C4.2 VR1.8 | length 1.5
  Bottom Layer w0.254: C4.2@-21.399,-47.246 VR1.8@-21.399,-45.699
NetC5_1: C5.1 L1.1 VR1.3 | length 10.6
  Top Layer w0.254: C5.1 -28.575,-41.021 v4(-27.813,-40.259)
  Bottom Layer w0.7: L1.1@-26.855,-35.814 -26.855,-38.92 -28.194,-40.259 -28.194,-42.418 -27.572,-43.04 VR1.3@-26.753,-43.04
NetC5_2: C5.2 VR1.1 | length 4.7
  Top Layer w0.254: v4@-28.702,-45.595 C5.2@-28.702,-43.118
  Bottom Layer w0.254: v4@-28.702,-45.595 VR1.1@-26.499,-45.595
  other v4: -28.702,-45.593
NetC18_2: C18.2 U2.14 | length 1.3
  Bottom Layer w0.254: U2.14 2.024,-2.04 C18.2@2.602,-1.462
NetC28_2: C28.2 L2.1 U1.46 U1.47 | length 6.5
  Top Layer w0.254: U1.46 6.786,-16.867 7.493,-16.867 ; U1.47 7.493,-16.867 ; C28.2@8.595,-17.502 8.427,-17.334 7.96,-17.334 7.493,-16.867 ; C28.2@8.836,-17.407 L2.1
NetD3_2: D3.2 IR_A.1 R6.2 | length 40.2
  Bottom Layer w0.254: D3.2@-13.43,-9.722 IR_A.1 -13.43,-3.397 -11.176,-1.143 -4.064,-1.143 -2.159,0.762 3.215,0.762 3.85,1.397 5.08,1.397 5.849,0.628 5.849,-2.235 5.715,-2.369 5.715,-5.37 6.187,-5.842 6.604,-5.842 7.239,-6.477 7.239,-7.62 6.604,-8.255 6.096,-8.255 5.715,-8.636 R6.2
NetD4_2: D4.2 IR_B.1 R8.2 | length 5.2
  Bottom Layer w0.254: IR_B.1 9.43,-9.462 9.645,-9.677 R8.2@9.645,-11.176
NetERR_2: ERR.2 R20.2 | length 1.2
  Top Layer w0.254: ERR.2 R20.2
NetF1_2: F1.2 SW1.2 | length 3.9
  Top Layer w0.7: F1.2@-23.876,-9.017 SW1.2
NetF2_1: F2.1 USB1.1 | length 3.3
  Bottom Layer w0.4: F2.1 25.861,-25.908 USB1.1
NetMOT_A_1: MOT_A.1 U5.1 U5.2 | length 20
  Top Layer w0.35: U5.1 -3.067,-41.802 -2.417,-41.152 U5.2
  Top Layer w0.6: MOT_A.1 -15.24,-47.498 -11.176,-43.434 -4.826,-43.434 -3.067,-41.675
NetMOT_A_2: MOT_A.2 U5.5 U5.6 | length 22.2
  Top Layer w0.35: -0.467,-42.504 U5.5 ; 0.183,-41.854 U5.6
  Top Layer w0.4: -0.381,-42.418 0.183,-41.854
  Top Layer w0.6: MOT_A.2 -12.7,-46.482 -10.922,-44.704 -1.778,-44.704 -0.381,-43.307 -0.381,-42.418
NetMOT_B_1: MOT_B.1 U5.7 U5.8 | length 33.5
  Top Layer w0.35: 0.833,-42.235 U5.7 ; 1.483,-42.885 U5.8
  Top Layer w0.45: 0.833,-42.235 1.483,-42.885
  Top Layer w0.6: 1.483,-42.885 3.429,-44.831 v2(12.192,-44.831)
  Bottom Layer w0.6: v2(12.192,-44.831) 16.764,-49.403 MOT_B.1
NetMOT_B_2: MOT_B.2 U5.11 U5.12 | length 32.1
  Top Layer w0.35: 3.433,-41.152 U5.11 ; 4.064,-41.783 4.083,-41.783 U5.12
  Top Layer w0.4: 3.433,-41.152 4.064,-41.783
  Top Layer w0.6: 4.083,-41.783 v2(13.208,-41.783)
  Bottom Layer w0.6: v2(13.208,-41.783) 19.177,-47.752 28.194,-47.752 29.21,-48.768 MOT_B.2
NetPWR_2: PWR.2 R5.2 | length 1
  Top Layer w0.254: PWR.2 R5.2
NetR1_1: R1.1 R2.2 VR1.5 | length 3.9
  Bottom Layer w0.254: VR1.5@-21.504,-41.785 -19.556,-41.785 -19.556,-40.88 R1.1
NetR4_1: R4.1 VR1.7 | length 4.5
  Bottom Layer w0.254: VR1.7@-21.758,-44.31 -20.333,-44.31 -19.685,-44.958 R4.1
NetR12_2: R12.2 Wifi.2 | length 1
  Top Layer w0.254: Wifi.2 R12.2
NetR15_2: 
NetR18_1: R18.1 U1.22 | length 6.9
  Top Layer w0.254: R18.1@-9.97,-21.399 -8.636,-20.066 -7.864,-20.066 U1.22
NetR19_1: R19.1 U1.23 | length 5.7
  Top Layer w0.254: R19.1 -8.255,-20.828 -8.001,-20.574 -7.665,-20.574 U1.23
PGND1: R10.1 U3.4 U5.3 U5.4 | length 15.9
  Top Layer w0.35: -1.767,-42.407 U5.3 ; -1.117,-41.757 U5.4
  Top Layer w0.4: -1.767,-42.407 -1.117,-41.757
  Top Layer w0.6: v2(-2.54,-43.18) -1.576,-42.216
  Bottom Layer w0.254: U3.4 -5.999,-36.86 -6.35,-37.211 -6.35,-37.719 -6.096,-37.973 -3.683,-37.973 R10.1@-2.54,-39.116
  Bottom Layer w0.6: v2(-2.54,-43.18) R10.1@-2.54,-39.116
PGND2: R11.2 U4.4 U5.9 U5.10 | length 15.2
  Top Layer w0.35: 2.133,-41.757 U5.9 ; 2.783,-42.407 U5.10
  Top Layer w0.4: 2.133,-41.757 2.783,-42.407
  Top Layer w0.6: 2.783,-42.407 3.418,-43.042 v2@7.747,-43.042
  Bottom Layer w0.254: R11.2@7.697,-39.32 7.493,-39.116 7.493,-37.338 7.717,-37.114 U4.4
  Bottom Layer w0.6: R11.2@7.239,-40.717 7.747,-41.225 v2@7.747,-43.042
  other v2: 7.747,-43.053
PWMA: U1.33 U5.23 | length 15.7
  Top Layer w0.254: U5.23 v3@-2.417,-30.48 ; U1.33 2.032,-21.305 2.032,-24.257 2.159,-24.384 v3(2.159,-27.372)
  Bottom Layer w0.254: v3(-2.413,-30.48) -2.032,-30.099 -1.27,-30.099 1.457,-27.372 v3(2.159,-27.372)
PWMB: U1.41 U5.15 | length 18.4
  Top Layer w0.254: U5.15 2.783,-31.993 7.112,-27.664 7.112,-20.828 ; U1.41 7.112,-20.728
RESET_N: C19.2 JTAG.6 R15.2 SW_Reset.1 U1.30 | length 47.8
  Top Layer w0.254: JTAG.6 -17.145,-15.748 -17.145,-6.034 C19.2 -15.429,-4.318 -13.589,-4.318 -9.271,-4.318 R15.2@-7.612,-4.318 ; v3(-2.921,-21.59) -2.921,-20.78 U1.30
  Bottom Layer w0.254: JTAG.6 -16.637,-19.812 -16.637,-24.257 -15.748,-25.146 -7.362,-25.146 -3.797,-21.581 -3.315,-21.581 -3.306,-21.59 v3(-2.921,-21.59)
SCK: U1.14 | length 11.3
  Top Layer w0.254: v2(-15.875,-8.636) -13.589,-10.922 -6.937,-10.922 U1.14
SENSE_A: U1.43 U3.6 | length 36.8
  Top Layer w0.254: U1.43 8.128,-20.33 8.128,-26.924 10.033,-28.829 10.033,-34.036 v3(9.398,-34.671)
  Bottom Layer w0.254: U3.6 -5.842,-35.56 -6.096,-35.306 -6.096,-34.925 -5.588,-34.417 9.144,-34.417 v3(9.398,-34.671)
SENSE_B: U1.42 U4.6 | length 22.4
  Top Layer w0.254: U1.42 7.62,-20.529 7.62,-27.178 9.271,-28.829 9.271,-33.528 v3(6.985,-35.814)
  Bottom Layer w0.254: v3(6.985,-35.814) U4.6
SERVO_SIG: R21.1 Servo.1 U1.32 | length 52.4
  Top Layer w0.254: U1.32 -2.159,-21.432 -2.159,-22.225 -1.905,-22.479 v1(-1.27,-22.479) ; v1(9.779,-22.479) 9.779,-26.416 12.113,-28.75 12.113,-31.29 18.542,-37.719 18.542,-40.894 21.336,-43.688 22.225,-43.688 23.749,-45.212 27.813,-45.212 28.067,-44.958 28.067,-44.006 27.654,-43.593 27.654,-40.418 Servo.1@27.813,-40.259
  Bottom Layer w0.254: v1(-1.27,-22.479) v1(9.779,-22.479)
STBY: U1.38 U5.19 | length 18.4
  Top Layer w0.254: U5.19@0.183,-33.457 v3(0.183,-31.44) ; v3(2.159,-30.099) 5.461,-26.797 5.461,-21.199 U1.38
  Bottom Layer w0.254: v3(0.183,-31.44) 0.183,-31.059 1.143,-30.099 v3(2.159,-30.099)
TCK: JTAG.1 U1.15 | length 16.5
  Top Layer w0.254: JTAG.1 -11.557,-23.114 -10.668,-22.225 -10.668,-13.335 -8.763,-11.43 -7.136,-11.43 U1.15
TDI: JTAG.9 U1.6 | length 12.7
  Top Layer w0.254: v3(-4.699,-7.112) -4.699,-7.503 U1.6
  Bottom Layer w0.254: JTAG.9 -11.049,-12.954 -5.207,-7.112 v3(-4.699,-7.112)
TDO: JTAG.3 U1.17 | length 8.8
  Top Layer w0.254: v1@-9.525,-16.256 v1(-9.398,-16.256) -7.589,-16.256 U1.17
  Bottom Layer w0.254: JTAG.3 -9.398,-17.653 v1(-9.398,-16.256)
TMS: JTAG.5 U1.18 | length 6.4
  Top Layer w0.254: v1(-10.033,-16.891) -7.517,-16.891 U1.18
  Bottom Layer w0.254: JTAG.5@-11.811,-17.653 -11.049,-16.891 v1(-10.033,-16.891)
USB_DETECT: R16.1 R17.2 U1.29 | length 16.4
  Top Layer w0.254: R17.2 R16.1@-9.16,-30.599 ; R16.1 -8.644,-30.615 -7.747,-29.718 -5.969,-29.718 -5.461,-29.21 -5.461,-28.321 ; v3(-3.556,-22.162) -3.556,-20.708 U1.29
  Bottom Layer w0.254: v3(-5.461,-28.575) -5.461,-24.066 v3(-3.556,-22.162)
USBC-DM: R18.2 USB1.2 | length 46.5
  Top Layer w0.254: R18.2@-10.033,-22.987 -9.779,-23.241 -9.779,-28.448 -9.017,-29.21 -7.112,-29.21 v3(-6.477,-28.575)
  Bottom Layer w0.254: v3(-6.477,-28.575) -5.588,-29.464 -3.27,-29.464 -2.762,-28.956 -1.651,-28.956 1.27,-26.035 10.545,-26.035 11.561,-25.019 13.462,-25.019 15.024,-26.581 27.663,-26.581 USB1.2
USBC-DP: R19.2 USB1.3 | length 46.1
  Top Layer w0.254: R19.2@-8.255,-22.733 -8.255,-23.368 -9.271,-24.384 -9.271,-28.067 -8.763,-28.575 v3(-7.366,-28.575)
  Bottom Layer w0.254: v3(-7.366,-28.575) -5.842,-30.099 -3.143,-30.099 -2.635,-29.591 -1.48,-29.591 1.568,-26.543 10.755,-26.543 11.771,-25.527 13.208,-25.527 14.889,-27.208 USB1.3
VBATT: Batt.1 F1.1 J1.1 | length 25.2
  Top Layer w0.8: F1.1@-24.13,-13.203 -24.13,-14.224 -20.193,-18.161 -20.193,-22.491 -20.828,-23.126 J1.1@-20.828,-24.13
  Bottom Layer w0.8: J1.1@-21.082,-26.162 J1.1@-20.701,-26.543 ; J1.1 -20.955,-28.194 -16.637,-32.512 Batt.1
VDDCORE: C24.2 C25.2 L2.2 U1.26 | length 26.3
  Top Layer w0.254: U1.26 -4.826,-19.857 -4.826,-23.749 -3.429,-25.146 C25.2@-3.175,-25.146 ; v1(10.287,-19.431) L2.2
  Bottom Layer w0.254: v1(-3.937,-24.638) -3.937,-24.003 -1.778,-21.844 8.636,-21.844 10.287,-20.193 v1(10.287,-19.431)
VIN: C1.2 R4.2 SW1.1 U6.G VR1.2 | length 74.7
  Top Layer w0.7: v2(-30.111,-45.974) -30.111,-39.89 ; U6.G@-23.753,-33.532 -30.111,-39.89 ; SW1.1 -23.264,-4.317 -26.892,-7.945 -26.892,-16.859 -30.111,-20.078 -30.111,-39.89
  Bottom Layer w0.254: -30.111,-46.978 -28.46,-48.629 R4.2 ; C1.2@-30.111,-44.438 -30.351,-44.198 -30.15,-44.298 C1.2@-30.097,-44.325
  Bottom Layer w0.7: -30.111,-46.978 C1.2@-30.111,-44.438 ; C1.2@-30.097,-44.325 VR1.2@-26.499,-44.325
VUSB: F2.2 R16.2 U6.D | length 47.8
  Top Layer w0.4: U6.D -21.39,-34.217 -15.945,-34.217 -15.691,-33.963 -11.738,-33.963 -9.39,-31.615 -8.644,-31.615 -7.382,-30.353 -5.748,-30.353 -3.969,-28.574 v2@-3.969,-28.353
  Bottom Layer w0.4: v2(-3.683,-28.321) -3.175,-27.813 -1.397,-27.813 1.016,-25.4 10.287,-25.4 11.303,-24.384 21.717,-24.384 F2.2@22.225,-24.892
WIFI_LED: U1.4 Wifi.1 | length 23
  Top Layer w0.254: v1(-5.588,-1.905) -4.699,-1.016 4.748,-1.016 5.85,0.086 Wifi.1 ; v1(-3.175,-4.572) -3.429,-4.826 -3.429,-7.359 U1.4 ; Wifi.1@5.85,0.724 7.031,1.905 v2(7.239,1.905)
  Bottom Layer w0.254: v1(-5.588,-1.905) -5.08,-1.905 -3.175,-3.81 v1(-3.175,-4.572)
WIFI_NLINK: U1.9 U7.10 | length 34.6
  Top Layer w0.254: U1.9 -6.35,-7.974 -6.35,-3.683 -4.191,-1.524 -2.794,-1.524 -2.032,-2.286 15.621,-2.286 17.052,-3.717 U7.10
WIFI_NRELOAD: U1.51 U7.3 | length 17.4
  Top Layer w0.254: U1.51 6.937,-10.922 8.763,-10.922 11.815,-13.974 11.815,-15.625 13.907,-17.717 U7.3
WIFI_NRESET: U1.56 U7.4 | length 18.9
  Top Layer w0.254: U1.56 6.196,-8.128 10.287,-8.128 17.876,-15.717 U7.4
WIFI_PWM_2: U1.8 U7.9 | length 33.5
  Top Layer w0.254: U1.8 -5.842,-7.774 -5.842,-3.937 -3.937,-2.032 -3.004,-2.032 -2.242,-2.794 15.24,-2.794 18.163,-5.717 U7.9@18.544,-5.717
WIFI_PWM_3: U1.7 U7.8 | length 32.5
  Top Layer w0.254: U1.7 -5.334,-7.575 -5.334,-6.858 -4.445,-5.969 -4.445,-4.064 -3.683,-3.302 15.03,-3.302 17.953,-6.225 17.992,-6.225 19.05,-7.283 U7.8
WIFI_PWR_SW: U1.5 U7.7 | length 31.6
  Top Layer w0.254: U1.5 -3.937,-7.558 -3.937,-4.318 -3.429,-3.81 14.819,-3.81 17.653,-6.644 17.653,-8.32 U7.7
WIFI_UART_RX: U1.3 U7.5 | length 31.8
  Top Layer w0.254: U1.3 -2.921,-7.16 -2.921,-5.334 -2.159,-4.572 14.351,-4.572 17.018,-7.239 17.018,-10.287 17.919,-11.188 17.919,-13.093 18.542,-13.716 U7.5@18.796,-13.716
WIFI_UART_TX: U1.2 U7.6 | length 28.8
  Top Layer w0.254: U1.2 -2.413,-6.961 -2.413,-5.588 -1.905,-5.08 13.716,-5.08 16.383,-7.747 16.383,-11.082 v3@17.018,-11.717
  Bottom Layer w0.254: v3@17.018,-11.717 U7.6
  other v3: 17.018,-11.684
pads on no net: Batt. ENC_A. ENC_B. IR_A. IR_B. JTAG.7 JTAG.8 Servo. SW1.3 SW1.4 U1.13 U1.21 U1.24 U1.28 U1.31 U1.61 U1.62 U1.63 U2.6 USB1.4

## Polygon pours and split planes (outlines as drawn)
GND on Bottom Layer "Top Layer-No Net" (solid, remove dead copper, pour order 4): 31.3,-0.381 31.3,-54 10.67,-54 10.67,-45.6 -10.67,-45.6 -10.67,-54 -31.3,-54 -31.3,-0.381 -14.2,-0.381 ccw(c-15.27,12.389) -4.8,5 cw(c0,0.2) 4.8,5 ccw(c15.155,12.142) 13.97,-0.381
GND on Top Layer "Top Layer-No Net" (solid, remove dead copper, pour order 3): 31.3,-0.381 31.3,-54 10.67,-54 10.67,-45.6 -10.67,-45.6 -10.67,-54 -31.3,-54 -31.3,-0.381 -14.2,-0.381 ccw(c-15.27,12.389) -4.8,5 cw(c0,0.2) 4.8,5 ccw(c15.155,12.142) 13.97,-0.381

## Keep-outs
Bottom Layer:
  lines w0.7 net GND: 27.811,-24.108 27.835,-24.108
Keep-Out Layer:
  pour cut-out: -6.477,-13.97 0,-20.447 6.477,-13.97 0,-7.493

## Other copper
Top Layer:
  pour cut-out: -26.034,-10.23 -26.034,-12.122 -22.226,-12.122 -22.226,-10.23
  pour cut-out: 19.304,-1.745 19.304,-0.381 19.177,-0.254 31.75,-0.254 32.512,-1.016 32.512,-1.27 31.75,-2.032
Bottom Layer:
  pour cut-out: 22.606,-23.749 24.384,-23.749 24.384,-26.162 22.606,-26.162
  pour cut-out: -1.27,-3.048 1.55,-3.04 1.55,-1.652 1.27,-1.651 1.273,-1.488 -1.273,-1.488
  pour cut-out: 8.001,-35.433 8.001,-37.457 7.881,-37.577 10.272,-37.577 10.287,-37.592 10.287,-35.433

## Silkscreen, mask and mechanical layers (free items; w line width, h text height)
Top Overlay:
  text "SCK" at -14.859,-9.017 h1
  text "MOSI" at 13.208,-13.081 h1
  text "MISO" at 13.208,-18.669 h1
  text "iRAT_Rattus 1.1" at -6.731,-44.704 h1
Bottom Overlay:
  lines w0.1: -4.58,-3.818 -4.826,-4.064 ; -4.572,-4.318 -4.826,-4.064 ; -4.088,-3.326 -3.81,-3.048 ; -3.556,-3.302 -3.81,-3.048 ; -4.826,-4.064 -3.81,-4.064 -3.81,-3.048
  text "y" at -2.54,-3.048 h1
  text "x" at -5.842,-4.826 h1
Mechanical 1:
  the board outline again, w0.254

## Text inside footprints (layer, text, board x,y; h text height)
C2: Bottom Overlay "+" at -13.462,-36.068 h1.52 r270
C7: Top Overlay "+" at 26.924,-33.02 h1.52 r270
JTAG: Top Overlay "2" at -14.351,-25.654 h1 r90; Top Overlay "1" at -11.811,-25.146 h1 r90; Top Overlay "9" at -11.811,-11.43 h1 r90; Top Overlay "10" at -14.351,-11.43 h1 r90